# Altium PCB FlexiblePartNoPowerPlanes.PcbDoc
Units mm, origin at the board's own origin, x right, y up, seen from the top; angles counter-clockwise.
Board outline 78.87 x 15.02 mm, 2 copper layers (Top Layer, Bottom Layer); 25 components, 18 nets, 76 pads, 19 vias.
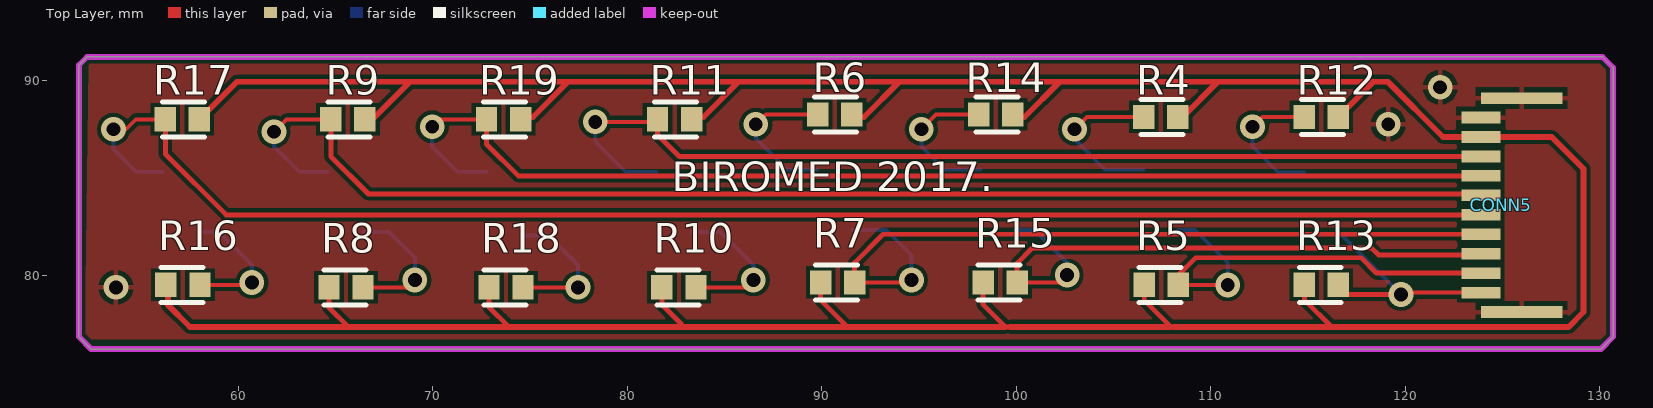
[diagram p0: Top Layer view]
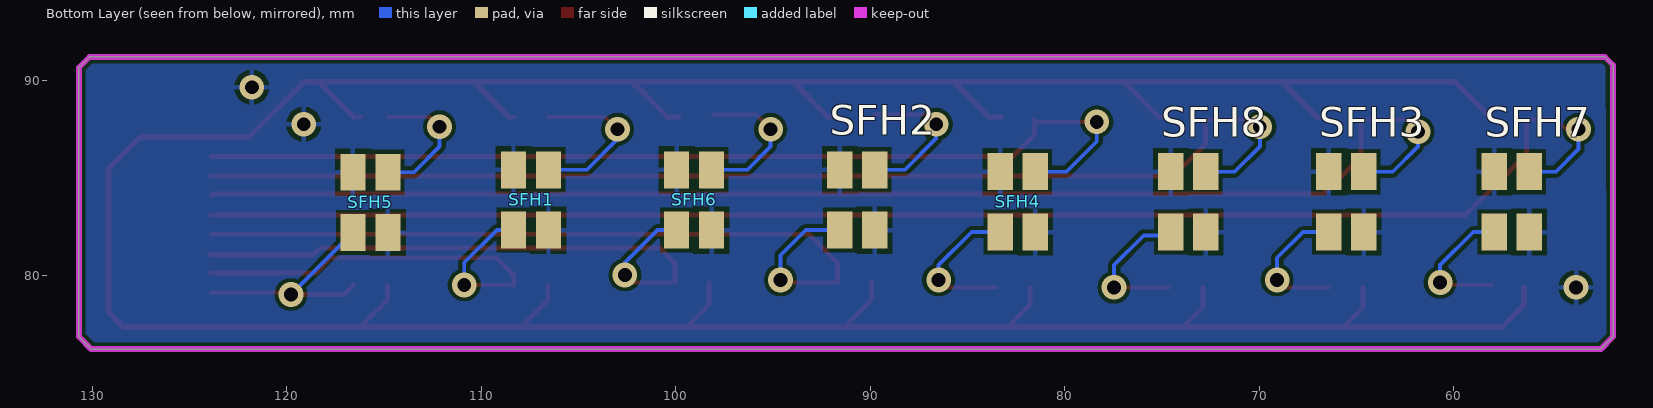
[diagram p1: Bottom Layer view, seen from below]

## Layer stack, top to bottom
Top Solder: solder mask 0.0102, Solder Resist, Dk 3.5
Top Layer: signal copper 0.0356
Dielectric 1: dielectric 0.32, FR-4, Dk 4.8
Bottom Layer: signal copper 0.0356
Bottom Solder: solder mask 0.0102, Solder Resist, Dk 3.5

## Board outline
51.816,76.835 51.816,90.805 52.234,91.223 130.138,91.223 130.683,90.678 130.683,76.835 130.048,76.2 52.451,76.2

## Design rules (kind name [scope] priority, off if disabled: settings)
Clearance [All] p1: gap=0.2 ignorepadtopadclearanceinfootprint=FALSE
PolygonConnect [All] p1: connectstyle=Relief reliefconductorwidth=0.254 reliefentries=4 polygonreliefangle="90 Angle" airgapwidth=0.254
RoomDefinition FlexiblePart [InComponentClass('FlexiblePart')] p1: confinementstyle=ConfineIn formatcopy=TRUE lockcomponents=FALSE outline 51.943,75.819 130.683,75.819 130.683,91.821 51.943,91.821
RoutingVias [All] p1: holewidth=0.6 width=1 viastyle="Through Hole" minholewidth=0.711 minwidth=1.27 maxholewidth=0.711 maxwidth=1.27
SolderMaskExpansion [All] p1: expansion=0.102
Width [All] p1: maxlimit=0.3 minlimit=0.2 preferedwidth=0.2 bottomlayer_maxwidth=0.2 minimp=50.000000 maximp=50.000000 favimp=50.000000
30 further rules are at their usual default settings.

## Components (designator, comment, footprint, x,y, rotation, side; value= is the part's Value field where it differs from the comment)
CONN5 "10_pin_connector" 10Pin_1mmpitch_FFC_FCP_ZIF 125.984,78.105 r90 top
R4 "1k" Resistor_1608 108.303,88.138 r180 top
R5 "100" Resistor_1608 106.581,79.502 r0 top
R6 "1k" Resistor_1608 91.539,88.265 r180 top
R7 "100" Resistor_1608 89.944,79.629 r0 top
R8 "1k" Resistor_1608 64.671,79.375 r0 top
R9 "100" Resistor_1608 66.52,88.011 r180 top
R10 "1k" Resistor_1608 81.788,79.375 r0 top
R11 "100" Resistor_1608 83.312,88.011 r180 top
R12 "1k" Resistor_1608 116.558,88.138 r180 top
R13 "100" Resistor_1608 114.808,79.502 r0 top
R14 "1k" Resistor_1608 99.822,88.265 r180 top
R15 "100" Resistor_1608 98.298,79.629 r0 top
R16 "1k" Resistor_1608 56.289,79.502 r0 top
R17 "100" Resistor_1608 58.011,88.011 r180 top
R18 "1k" Resistor_1608 72.898,79.375 r0 top
R19 "100" Resistor_1608 74.521,88.011 r180 top
SFH1 "SFH 7250" SFH_SENSOR_34x30 107.442,83.82 r0 bottom
SFH2 "SFH 7250" SFH_SENSOR_34x30 90.678,83.82 r0 bottom
SFH3 "SFH 7250" SFH_SENSOR_34x30 65.532,83.82 r180 bottom
SFH4 "SFH 7250" SFH_SENSOR_34x30 82.423,83.82 r180 bottom
SFH5 "SFH 7250" SFH_SENSOR_34x30 115.697,83.693 r0 bottom
SFH6 "SFH 7250" SFH_SENSOR_34x30 99.06,83.82 r0 bottom
SFH7 "SFH 7250" SFH_SENSOR_34x30 57.023,83.82 r180 bottom
SFH8 "SFH 7250" SFH_SENSOR_34x30 73.66,83.82 r180 bottom

## Footprints (in the part's own frame and the unit in brackets; to place one, negate y for a bottom-side part, rotate by r counter-clockwise, add the part's x,y. Pads: shape width x height; smd on the part's side, far side on the other; paste and mask are expansions set on the pad)
10Pin_1mmpitch_FFC_FCP_ZIF [mm]
  rect 0.6x2 smd: 1(1,2.1) 2(2,2.1) 3(3,2.1) 4(4,2.1) 5(5,2.1) 6(6,2.1) 7(7,2.1) 8(8,2.1) 9(9,2.1) 10(10,2.1)
  rect 0.6x4.2 smd: GND(0,0) GND(11,0)
  body extent 0,-2.5 11,1.6, height 1
Resistor_1608 [mm]
  rect 1.1x1.25 smd: Res_p1(0,0) Res_p2(1.75,0)
  silkscreen extent -0.26,-0.9 1.9,0.9, body extent -0.4,-0.7 2.2,0.7, height 1.5
SFH_SENSOR_34x30 [mm]
  rect 1.3x1.9 smd: LED_Anode(-0.9,-1.6) LED_Cathode(-0.9,1.5) PhT_Collector(0.9,1.5) PhT_Emitter(0.9,-1.6)
  body extent -1.6,-1.8 1.6,1.6, height 1.8

## Part data
CONN5: "10 Pin Connector"
R4 R5 R6 R7 R8 R9 R10 R11 R12 R13 R14 R15 R16 R17 R18 R19: library part Resistor_SMD, "SMD Resistor", Manifacturer=Vishay
SFH1 SFH2 SFH3 SFH4 SFH5 SFH6 SFH7 SFH8: library part Photoreflector, "Infrared Emitter - PhTransistor Receiver", Manifacturer=OSram

## Via types
v1: diameter 1.27, hole 0.711, Top Layer to Bottom Layer, 19 vias

## Nets (pads, with @x,y where several pads share a name; then routed paths per layer and width w, separated by ;. In a path a pad name is that pad's centre, name@x,y a point inside that pad or via, vN(x,y) a via of type N, cw(c..) or ccw(c..) an arc to the next point about the centre after c; other vN are vias at no path point)
3V3: CONN5.9 R4.Res_p1 R5.Res_p1 R6.Res_p1 R7.Res_p1 R8.Res_p1 R9.Res_p1 R10.Res_p1 R11.Res_p1 R12.Res_p1 R13.Res_p1 R14.Res_p1 R15.Res_p1 R16.Res_p1 R17.Res_p1 R18.Res_p1 R19.Res_p1 | length 195.2
  Top Layer w0.203: R4.Res_p1 R4.Res_p1@108.557,88.138 ; R12.Res_p1@116.177,88.138 R12.Res_p1
  Top Layer w0.254: R8.Res_p1 64.671,78.331 65.659,77.343 ; R9.Res_p1@66.548,88.138 R9.Res_p1@67.028,88.138 ; R18.Res_p1 72.898,78.359 73.914,77.343 ; R19.Res_p1@74.676,88.138 75.156,88.138 ; R10.Res_p1 81.788,78.486 82.804,77.47 82.804,77.343 ; R11.Res_p1@83.284,88.138 83.919,88.138 ; R7.Res_p1 89.944,78.712 91.313,77.343 91.44,77.343 ; R6.Res_p1@91.567,88.138 92.174,88.138 ; R15.Res_p1 98.298,78.486 99.441,77.343 99.695,77.343 ; R14.Res_p1@99.822,88.138 100.429,88.138 ; R5.Res_p1 106.581,78.712 107.95,77.343 108.077,77.343 ; R13.Res_p1 114.808,78.74 116.205,77.343
  Top Layer w0.3: R16.Res_p1@56.388,79.375 56.388,78.486 57.531,77.343 65.659,77.343 73.914,77.343 82.804,77.343 91.313,77.343 ; R17.Res_p1@58.138,88.138 59.944,89.944 68.834,89.944 ; R9.Res_p1@67.028,88.138 68.834,89.944 ; 75.156,88.138 76.962,89.944 ; 83.919,88.138 85.725,89.944 ; 91.44,77.343 99.441,77.343 ; 92.174,88.138 93.98,89.944 ; 99.695,77.343 107.95,77.343 ; 100.429,88.138 102.235,89.944 ; 108.077,77.343 116.205,77.343 128.397,77.343 129.159,78.105 129.159,85.471 127.525,87.105 CONN5.9 121.937,87.105 119.098,89.944 118.364,89.944 ; R4.Res_p1@108.557,88.138 110.363,89.944 ; R12.Res_p1 118.364,89.944 ; 68.834,89.944 76.962,89.944 ; 76.962,89.944 85.725,89.944 ; 85.725,89.944 93.98,89.944 ; 93.98,89.944 102.235,89.944 ; 102.235,89.944 110.363,89.944 ; 110.363,89.944 118.364,89.944
GND: CONN5.10 CONN5.GND SFH1.LED_Cathode SFH1.PhT_Emitter SFH2.LED_Cathode SFH2.PhT_Emitter SFH3.LED_Cathode SFH3.PhT_Emitter SFH4.LED_Cathode SFH4.PhT_Emitter SFH5.LED_Cathode SFH5.PhT_Emitter SFH6.LED_Cathode SFH6.PhT_Emitter SFH7.LED_Cathode SFH7.PhT_Emitter SFH8.LED_Cathode SFH8.PhT_Emitter
  other v1: 53.721,79.375 119.126,87.757 121.793,89.662
NetR4_Res_p2: R4.Res_p2 SFH1.LED_Anode | length 8.5
  Top Layer w0.2: v1(102.997,87.503) 103.632,88.138 R4.Res_p2
  Bottom Layer w0.2: v1(102.997,87.503) 102.997,86.995 104.572,85.42 SFH1.LED_Anode
NetR6_Res_p2: R6.Res_p2 SFH2.LED_Anode | length 8.1
  Top Layer w0.2: v1(86.614,87.757) 87.122,88.265 R6.Res_p2
  Bottom Layer w0.2: v1@86.614,87.884 v1(86.614,87.757) 86.614,87.02 88.214,85.42 SFH2.LED_Anode
NetR8_Res_p2: R8.Res_p2 SFH3.LED_Anode | length 7.2
  Top Layer w0.2: R8.Res_p2 68.707,79.375 v1(69.088,79.756)
  Bottom Layer w0.2: SFH3.LED_Anode 67.767,82.22 69.088,80.899 v1(69.088,79.756)
NetR10_Res_p2: R10.Res_p2 SFH4.LED_Anode | length 7.7
  Top Layer w0.2: R10.Res_p2 86.106,79.375 v1(86.487,79.756)
  Bottom Layer w0.2: SFH4.LED_Anode 84.785,82.22 86.487,80.518 v1(86.487,79.756)
NetR12_Res_p2: R12.Res_p2 SFH5.LED_Anode | length 7.1
  Top Layer w0.2: v1(112.141,87.63) 112.649,88.138 R12.Res_p2
  Bottom Layer w0.2: v1(112.141,87.63) 112.141,86.614 113.462,85.293 SFH5.LED_Anode
NetR14_Res_p2: R14.Res_p2 SFH6.LED_Anode | length 7.7
  Top Layer w0.2: v1(95.123,87.503) 95.885,88.265 R14.Res_p2
  Bottom Layer w0.2: v1(95.123,87.503) 95.123,86.614 96.317,85.42 SFH6.LED_Anode
NetR16_Res_p2: R16.Res_p2 SFH7.LED_Anode | length 7.1
  Top Layer w0.2: R16.Res_p2 60.579,79.502 v1(60.706,79.629)
  Bottom Layer w0.2: SFH7.LED_Anode 59.004,82.22 60.706,80.518 v1(60.706,79.629)
NetR18_Res_p2: R18.Res_p2 SFH8.LED_Anode | length 7.6
  Top Layer w0.2: R18.Res_p2 v1(77.47,79.375)
  Bottom Layer w0.2: SFH8.LED_Anode 74.738,82.042 75.946,82.042 77.47,80.518 v1(77.47,79.375)
S0: CONN5.1 R13.Res_p2 SFH5.PhT_Collector | length 12.1
  Top Layer w0.2: v1(119.779,79.012) 119.872,79.105 CONN5.1
  Top Layer w0.254: R13.Res_p2 117.048,79.012 v1(119.779,79.012)
  Bottom Layer w0.2: SFH5.PhT_Collector v1(119.779,79.012)
S1: CONN5.2 R5.Res_p2 SFH1.PhT_Collector | length 23.7
  Top Layer w0.2: R5.Res_p2 v1(110.871,79.502)
  Top Layer w0.254: R5.Res_p2 108.331,80.01 109.22,80.899 117.729,80.899 118.523,80.105 CONN5.2
  Bottom Layer w0.2: SFH1.PhT_Collector 109.196,82.32 110.871,80.645 v1(110.871,79.502)
S2: CONN5.3 R15.Res_p2 SFH6.PhT_Collector | length 32.2
  Top Layer w0.2: R15.Res_p2 102.235,79.629 v1(102.616,80.01)
  Top Layer w0.254: R15.Res_p2 100.048,80.617 100.838,81.407 118.237,81.407 118.248,81.418 118.629,81.037 123.952,81.037 CONN5.3
  Bottom Layer w0.2: SFH6.PhT_Collector 100.941,82.32 102.616,80.645 v1(102.616,80.01)
S3: CONN5.4 R7.Res_p2 SFH2.PhT_Collector | length 41.6
  Top Layer w0.2: R7.Res_p2 94.488,79.629 v1(94.615,79.756)
  Top Layer w0.254: R7.Res_p2 91.694,80.645 93.154,82.105 CONN5.4
  Bottom Layer w0.2: SFH2.PhT_Collector 93.321,82.32 94.615,81.026 v1(94.615,79.756)
S4: CONN5.5 R17.Res_p2 SFH7.PhT_Collector | length 77.6
  Top Layer w0.2: v1(53.594,87.503) 54.229,87.503 54.737,88.011 R17.Res_p2
  Top Layer w0.254: R17.Res_p2 56.261,86.233 59.389,83.105 CONN5.5
  Bottom Layer w0.2: v1(53.594,87.503) 53.594,86.487 54.761,85.32 SFH7.PhT_Collector
S5: CONN5.6 R9.Res_p2 SFH3.PhT_Collector | length 69.1
  Top Layer w0.2: v1(61.849,87.376) 62.484,88.011 R9.Res_p2
  Top Layer w0.254: R9.Res_p2 64.77,86.106 66.701,84.175 123.814,84.175 CONN5.6
  Bottom Layer w0.2: v1(61.849,87.376) 61.849,86.614 63.143,85.32 SFH3.PhT_Collector
S6: CONN5.7 R19.Res_p2 SFH8.PhT_Collector | length 60.3
  Top Layer w0.2: v1(69.977,87.63) 70.358,88.011 R19.Res_p2
  Top Layer w0.254: R19.Res_p2 72.771,86.741 74.407,85.105 CONN5.7
  Bottom Layer w0.2: v1(69.977,87.63) 69.977,86.614 71.271,85.32 SFH8.PhT_Collector
S7: CONN5.8 R11.Res_p2 SFH4.PhT_Collector | length 51.7
  Top Layer w0.2: v1(78.359,87.884) 81.435,87.884 R11.Res_p2
  Top Layer w0.254: R11.Res_p2 81.562,87.221 82.678,86.105 CONN5.8
  Bottom Layer w0.2: v1(78.359,87.884) 78.359,86.868 79.907,85.32 SFH4.PhT_Collector

## Polygon pours and split planes (outlines as drawn)
GND on Bottom Layer "Top Layer-No Net" (solid, pour order 8): 52.234,91.223 52.506,90.951 130.411,90.951 130.411,76.563 130.365,76.517 52.133,76.517
GND on Top Layer "Top Layer-No Net" (solid, pour order 10): 52.324,91.059 129.794,91.059 130.302,90.551 130.302,76.708 52.324,76.708 52.133,76.517

## Keep-outs
Keep-Out Layer:
  lines w0.3: 51.816,76.835 52.451,76.2 54.229,76.2 129.122,76.2 130.048,76.2 130.683,76.835 130.683,81.517 130.683,85.906 130.683,90.678 130.138,91.223 129.122,91.223 54.229,91.223 52.234,91.223 51.816,90.805 51.816,85.054 51.816,82.369 51.816,76.835

## Silkscreen, mask and mechanical layers (free items; w line width, h text height)
Top Overlay:
  text "BIROMED 2017." at 82.296,84.328 h1.52